# Altium PCB 15-I2C-EPPROM.PcbDoc
Units mm, origin at the board's own origin, x right, y up, seen from the top; angles counter-clockwise.
Board outline 39.8 x 39.8 mm, 2 copper layers (Top Layer, Bottom Layer); 15 components, 12 nets, 52 pads, 16 vias.
Unrouted connection lines stored in the file: 35.
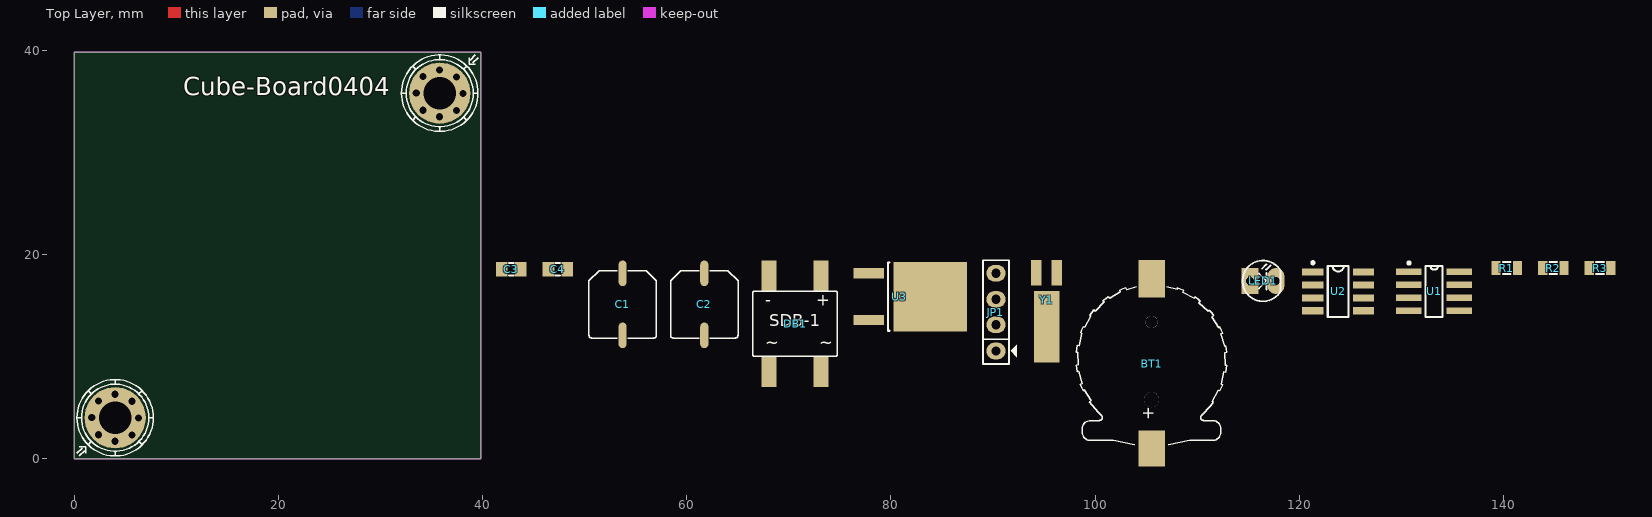
[diagram p0: Top Layer view]
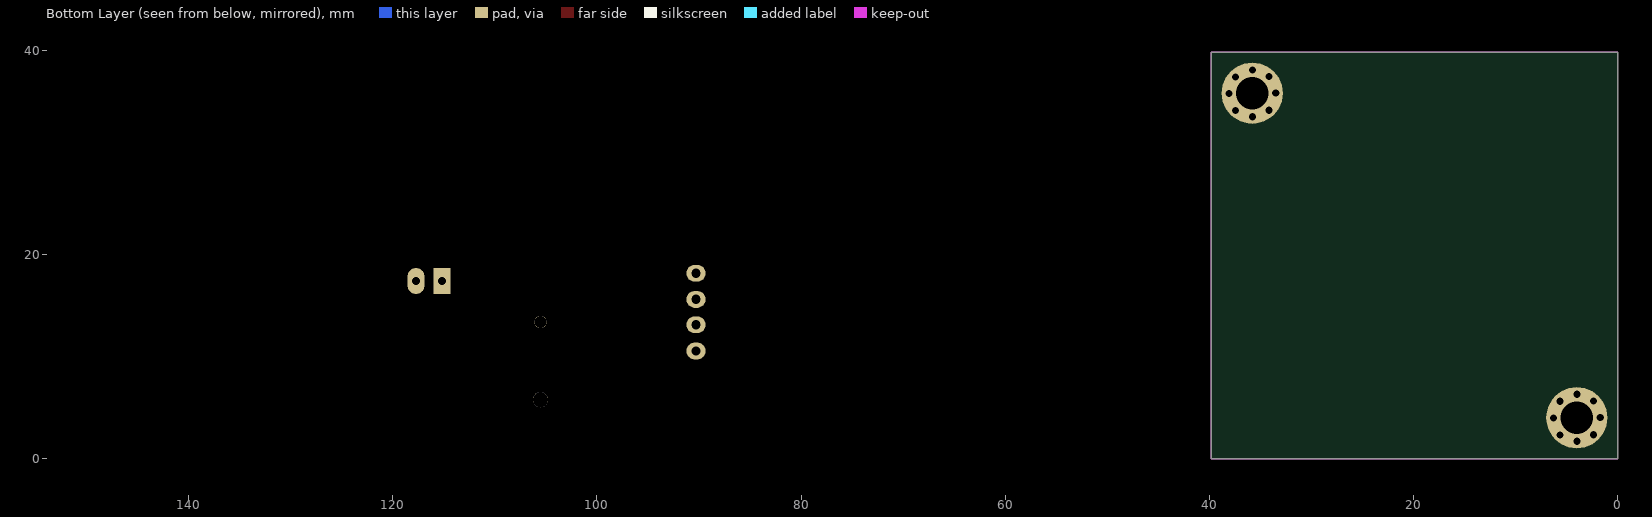
[diagram p1: Bottom Layer view, seen from below]

## Layer stack, top to bottom
Top Solder: solder mask 0.0102, Solder Resist, Dk 3.5
Top Layer: signal copper 0.0356
Dielectric 1: dielectric 0.32, FR-4, Dk 4.8
Bottom Layer: signal copper 0.0356
Bottom Solder: solder mask 0.0102, Solder Resist, Dk 3.5

## Board outline
0,0 0,39.8 39.8,39.8 39.8,0

## Design rules (kind name [scope] priority, off if disabled: settings)
Clearance [All] p1: gap=0.254
PolygonConnect [All] p1: connectstyle=Relief reliefconductorwidth=0.254 reliefentries=4 polygonreliefangle="90 Angle" airgapwidth=0.254
RoutingVias [All] p1: holewidth=0.7 width=1 viastyle="Through Hole" minholewidth=0.7 minwidth=1 maxholewidth=1 maxwidth=2
SolderMaskExpansion [All] p1: expansion=0.102
Width [All] p1: maxlimit=0.254 minlimit=0.254 preferedwidth=0.254
30 further rules are at their usual default settings.

## Components (designator, comment, footprint, x,y, rotation, side; value= is the part's Value field where it differs from the comment)
BT1 "PIN 3V" SK-BATT-CR1220 105.535,9.777 r90 top
C1 "470uF" C-ALU-D6.5 53.719,15.111 r0 top
C2 "470uF" C-ALU-D6.5 61.72,15.111 r0 top
C3 "104" C-0805 42.797,18.54 r0 top
C4 "104" C-0805 47.369,18.54 r0 top
DB1 "Diode Brideg" D-DB-1A-SMD 70.61,13.206 r0 top
JP1 "HEADER 4" JP4 90.295,13.079 r90 top
LED1 "LED" LED-3 115.187,17.397 r0 top
R1 "330R" R-0805 140.333,18.667 r0 top
R2 "10K" R-0805 144.905,18.667 r0 top
R3 "10K" R-0805 149.477,18.667 r0 top
U1 "DS1307" SO-8-DS1307 133.221,16.381 r0 top
U2 "24C512" SO-8-24C64 123.823,16.381 r0 top
U3 "ASM1117" TO-252 81.913,15.873 r0 top
Y1 "32768hz" XTAL-AB38T-SMD 95.248,15.619 r90 top

## Footprints (in the part's own frame and the unit in brackets; to place one, negate y for a bottom-side part, rotate by r counter-clockwise, add the part's x,y. Pads: shape width x height; smd on the part's side, far side on the other; paste and mask are expansions set on the pad)
C-0805 [mm] "Chip Capacitor, 2-Leads, Body 2.0x1.3mm, IPC Medium Density"
  rect 1.15x1.4 smd: 1(-0.925,0) 2(0.925,0)
  silkscreen extent -0.22,-0.6 0.23,0.6, body extent -1,-0.63 1,0.63, height 0.5
C-ALU-D6.5 [mm] "6.3x5.4mm"
  oval 0.8x2.5 smd: 1(0,3.038) 2(0,-3.038)
  silkscreen extent -3.3,-3.3 3.3,3.3, body extent -3.3,-3.8 3.3,3.8, height 6.25
D-DB-1A-SMD [mm] "DB106S"
  rect 1.5x3 smd: 1(-2.55,-4.713) 2(2.55,-4.713) 3(2.55,4.713) 4(-2.55,4.713)
  silkscreen extent -4.15,-3.18 4.15,3.18, body extent -4.15,-4.95 4.15,4.95, height 3.35
JP4 [mil] "Jumper 4"
  oval 65x75 hole 36: 1(-100,0) 2(1,0) 3(99,0) 4(200,0)
  silkscreen extent -150,-81 250,50
LED-3 [mil] "LED 2 PIN, 3ly Only colour"
  rect 65x100 hole 32: 1(0,0)
  oval 65x100 hole 32: 2(100,0)
  silkscreen extent -29,-78 118,79, body extent -25,-75 113,75, height 217
R-0805 [mm] "Chip Resistor, 2-Leads, Body 2.0x1.3mm, IPC Medium Density"
  rect 0.9x1.35 smd: 1(-1.05,0) 2(1.05,0)
  silkscreen extent -0.38,-0.58 0.38,0.58, body extent -1,-0.63 1,0.63, height 0.5
SK-BATT-CR1220 [mm]
  rect 3.54x2.6 smd: 1(-8.782,0)
  rect 3.66x2.6 smd: 2(7.842,0)
  round 1.5 hole 1.5: HM1(-4,0)
  round 1.2 hole 1.2: HM2(3.6,0)
  silkscreen extent -8.4,-7.37 7.07,7.37, body extent -9.7,-7.37 9.1,7.37, height 4.23
SO-8-24C64 [mm]
  rect 2.1x0.7 smd: 1(-2.475,1.905) 2(-2.475,0.635) 3(-2.475,-0.635) 4(-2.475,-1.905) 5(2.475,-1.905) 6(2.475,-0.635) 7(2.475,0.635) 8(2.475,1.905)
  silkscreen extent -2.6,-2.5 1.03,2.93, body extent -3,-2.46 3,2.44, height 1.75
SO-8-DS1307 [mm]
  rect 2.5x0.65 smd: 1(-2.475,1.905) 2(-2.475,0.635) 3(-2.475,-0.635) 4(-2.475,-1.905) 5(2.475,-1.905) 6(2.475,-0.635) 7(2.475,0.635) 8(2.475,1.905)
  silkscreen extent -2.6,-2.5 0.83,2.9, body extent -3,-2.44 3,2.46, height 1.75
TO-252 [mm] "AMS1117"
  rect 3x1 smd: 1(-4.1,2.29) 3(-4.1,-2.29)
  rect 7.2x6.8 smd: 2(1.95,0)
  silkscreen extent -2.2,-3.35 -2.05,3.35, body extent -4.55,-3.37 5.36,3.37, height 2.39
XTAL-AB38T-SMD [mm]
  rect 2.5x1 smd: 1(2.58,-1) 2(2.58,1)
  rect 7x2.5 smd: TAB(-2.7,0)
  body extent -5.55,-1.17 3.45,1.17, height 2.1

## Part data
BT1: "Battery 3VDC"
C1 C2: library part CP1, "Cap P  0,1uF < 22uF , 16 - 50V"
C3 C4: library part CN
DB1: library part DB, "Convert AC to DC voltage, 4 pin"
JP1: library part JP4
LED1: "LED Single colour Green and Red"
R1 R2 R3: library part R, "Resistor 1/4W"
U1: "Real Timer Serial"
U2: library part 24Cxx, "Standard 2-Wire Bus Interface Serial EEPROM"
Y1: library part XT2, "Crystal For all Crystal 2pin."

## Free pads (board coordinates)
  round 6 hole 3.2: GND2(4,4) VCC2(35.8,35.8)

## Via types
v1: diameter 1, hole 0.7, Top Layer to Bottom Layer, 16 vias

## Nets (pads, with @x,y where several pads share a name; then routed paths per layer and width w, separated by ;. In a path a pad name is that pad's centre, name@x,y a point inside that pad or via, vN(x,y) a via of type N, cw(c..) or ccw(c..) an arc to the next point about the centre after c; other vN are vias at no path point)
+5V: C2.1 C4.2 JP1.3 R1.2 R2.2 R3.2 U1.8 U2.7 U2.8 U3.2
+12V: C1.1 C3.2 DB1.3 U3.3
GND: BT1.2 C1.2 C2.2 C3.1 C4.1 DB1.4 JP1.4 U1.4 U2.1 U2.2 U2.3 U2.4 U3.1
GND1: DB1.1
NetBT1_1: BT1.1 U1.3
NetLED1_1: LED1.1 R1.1
NetLED1_2: LED1.2 U1.7
NetU1_1: U1.1 Y1.1
NetU1_2: U1.2 Y1.2
SCL: JP1.1 R2.1 U1.6 U2.6
SDA: JP1.2 R3.1 U1.5 U2.5
VCC1: DB1.2
pads on no net: BT1.HM1 BT1.HM2 Y1.TAB
copper on no net:
  other v1: 3.988,1.703 5.639,2.312 2.362,2.338 6.274,3.989 1.702,4.014 5.639,5.614 2.362,5.64 3.988,6.3 35.788,33.489 37.439,34.099 34.162,34.124 38.074,35.775 33.502,35.801 37.439,37.401 34.162,37.426 35.788,38.087

## Keep-outs
Keep-Out Layer:
  lines w0.127: 0,0 39.8,0 39.8,39.8 0,39.8

## Silkscreen, mask and mechanical layers (free items; w line width, h text height)
Top Overlay:
  circle w0.127: c35.8,35.8 r3.291
  circle w0.127: c35.8,35.8 r3.747
  circle w0.127: c4,4 r3.291
  circle w0.127: c4,4 r3.747
  lines w0.127: 0.244,0.508 0.752,1.016 ; 0.253,4 0.709,4 ; 0.498,0.254 1.006,0.762 ; 0.498,1.143 1.133,1.143 1.133,0.508 ; 1.35,1.35 1.673,1.673 ; 1.35,6.65 1.673,6.327 ; 4,0.253 4,0.709 ; 6.327,1.673 6.65,1.35 ; 6.327,6.327 6.65,6.65 ; 7.291,4 7.747,4 ; 32.053,35.8 32.509,35.8 ; 33.15,33.15 33.473,33.473 ; 33.15,38.45 33.473,38.127 ; 35.8,39.091 35.8,39.547 ; 38.127,33.473 38.45,33.15 ; 38.127,38.127 38.45,38.45 ; 38.667,39.292 38.667,38.657 39.302,38.657 ; 38.794,39.038 39.302,39.546 ; 39.048,38.784 39.556,39.292 ; 39.091,35.8 39.547,35.8 ; 4,7.291 4,7.747 ; 4,7.291 4,7.747 ; 4,7.291 4,7.747 ; 35.8,32.053 35.8,32.509 ; 35.8,32.053 35.8,32.509 ; 35.8,32.053 35.8,32.509
  text "Cube-Board0404" at 10.668,35 h3
Mechanical 1:
  circle w0.003: c35.8,35.787 r3
  circle w0.003: c35.8,35.8 r1.6
  circle w0.003: c4,4 r3
  circle w0.003: c4,4 r1.6
  lines w0.127: 0,0 0,39.8

## Text inside footprints (layer, text, board x,y; h text height)
BT1: Top Overlay "+" at 106.164,3.777 h2 r90
DB1: Top Overlay "~        ~" at 67.689,10.412 h2; Top Overlay "-         +" at 67.689,14.603 h2; Top Overlay "SDB-1" at 68.103,12.567 h2